# Allegro board TUBiiPrelim.brd
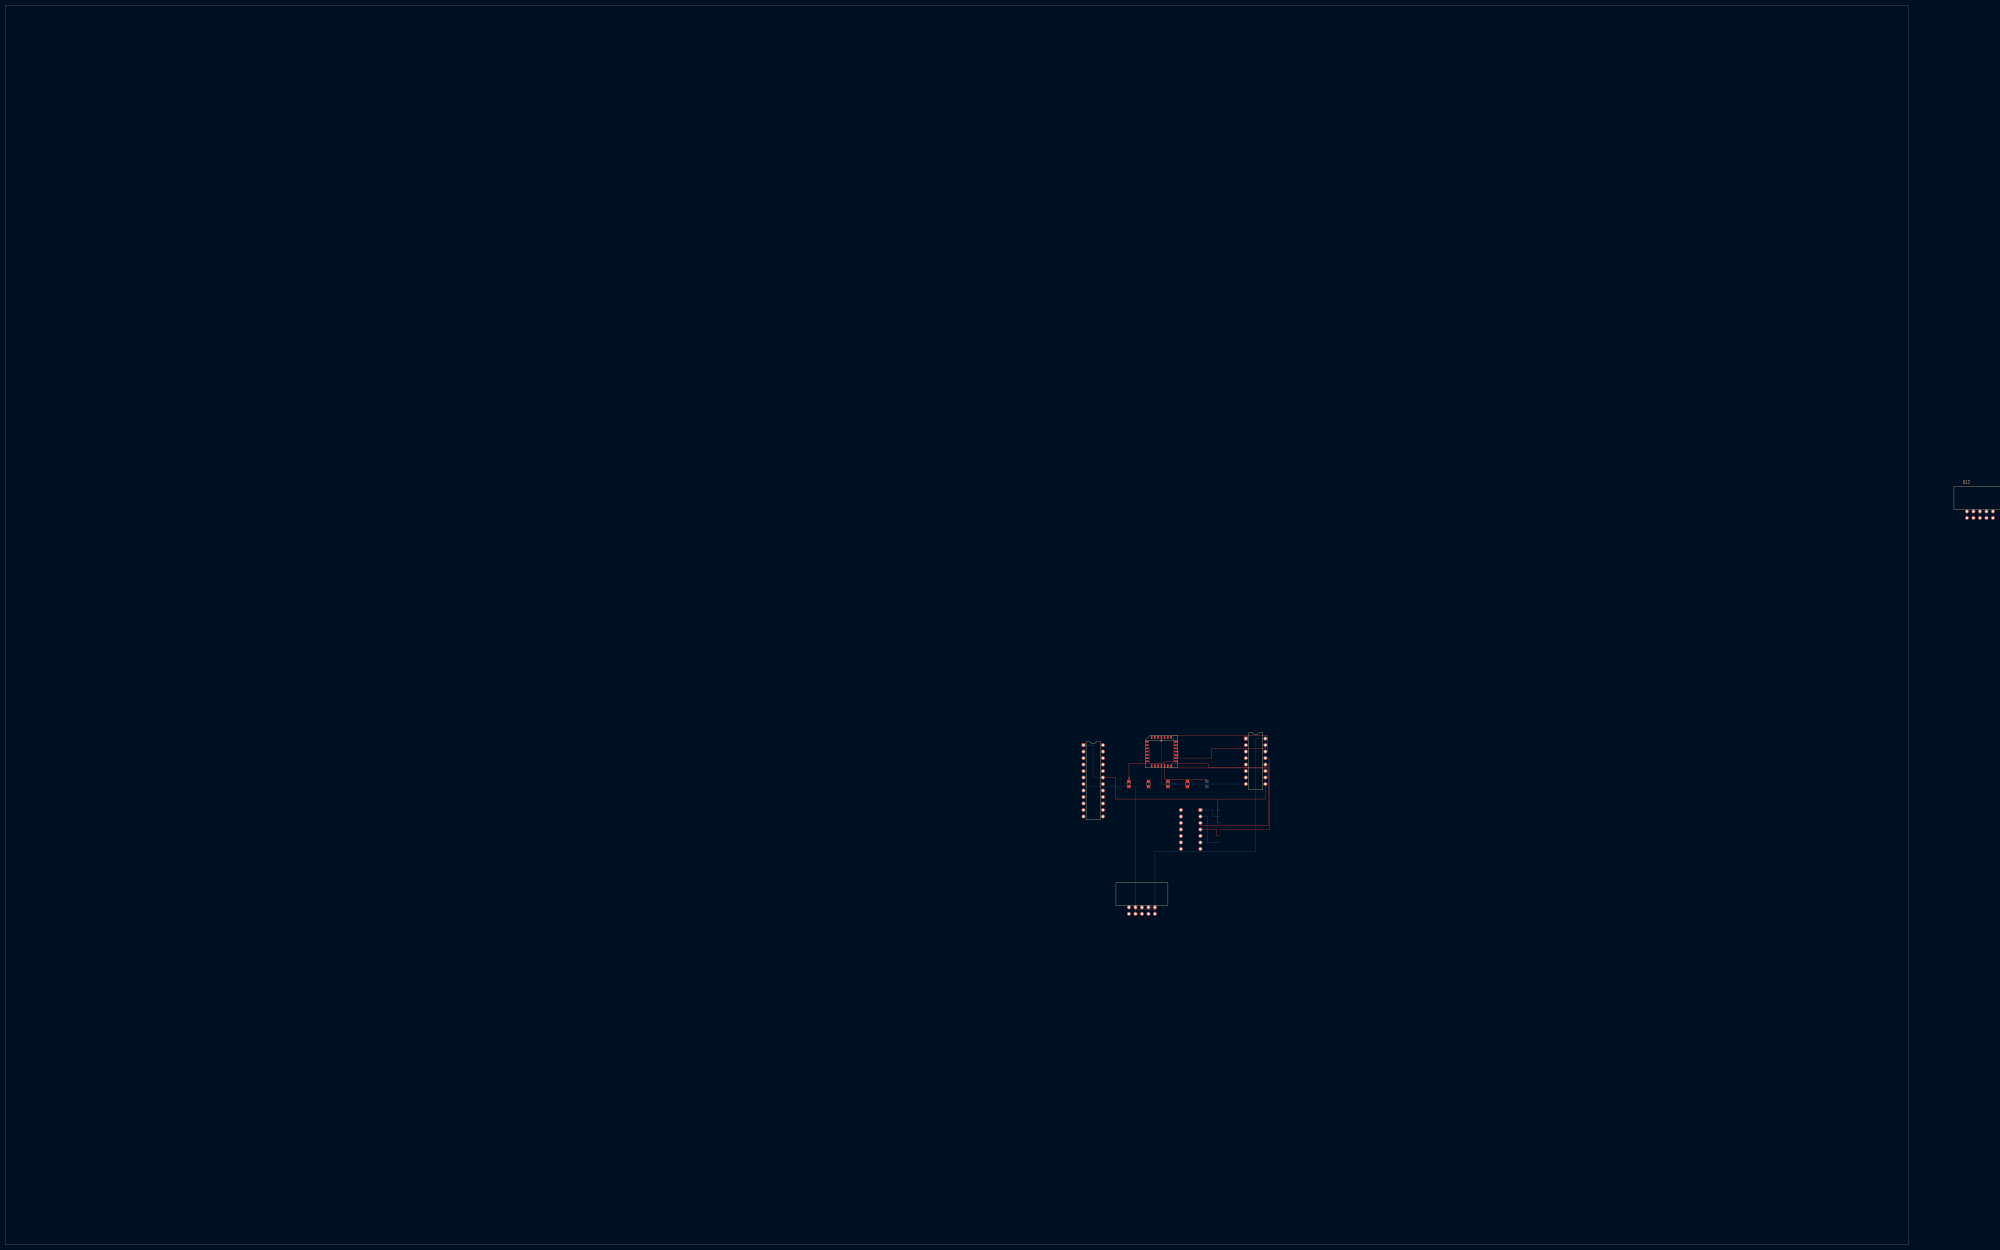
[diagram p0: board, top side]
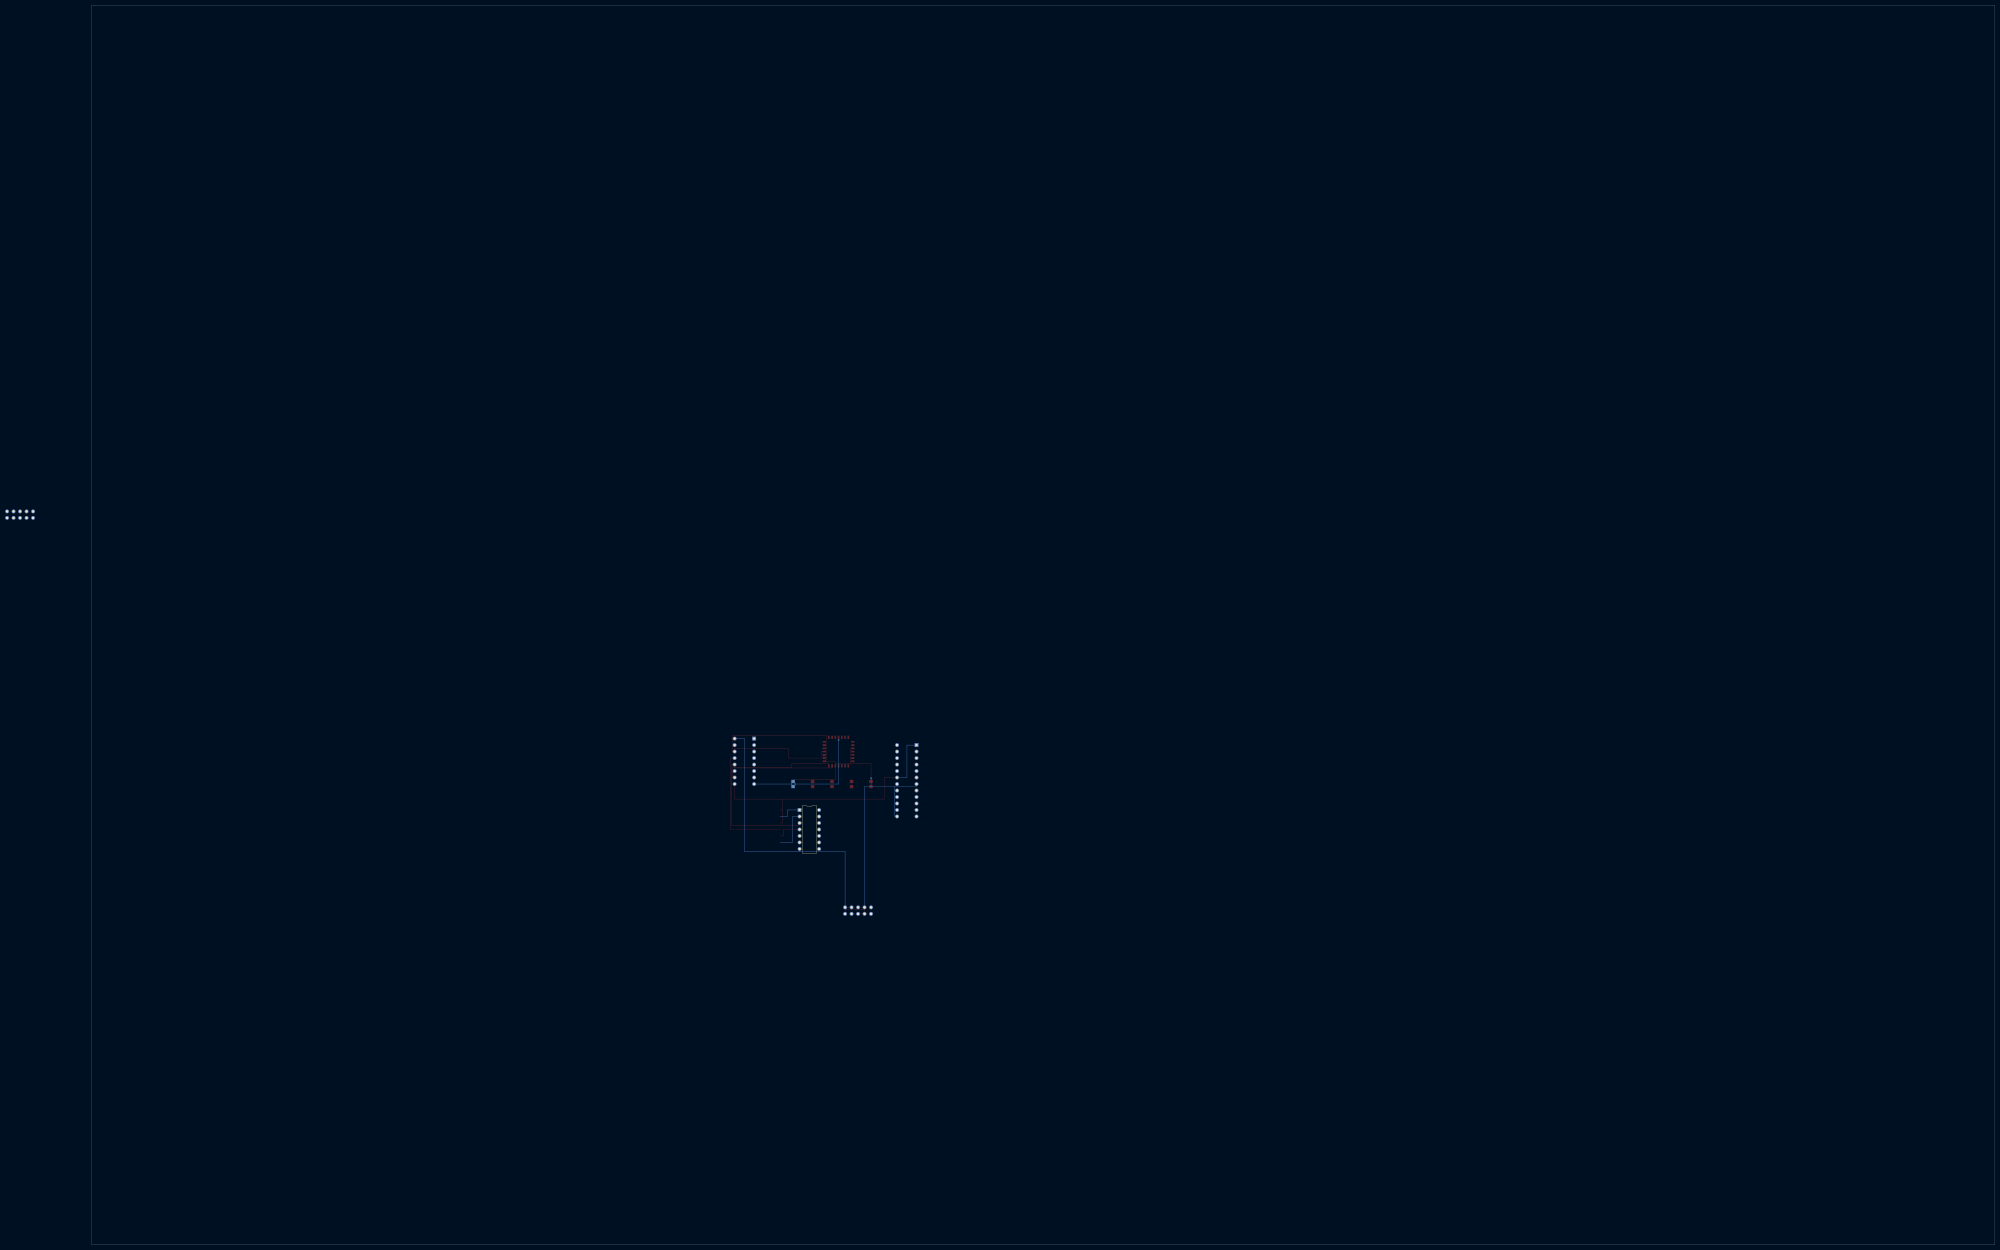
[diagram p1: board, bottom side, seen from below]

Outline 744.22 x 485.14 mm; copper layers: TOP, MYPLANE, VCC, BOTTOM. Coordinates in mm from the lower left corner of the outline.
Outline path: 0,485.14 0,0 744.22,0 744.22,485.14 0,485.14

## Design rules (mm)
net group POWER: nets POWER<2> POWER<3>
net group BD: nets BD<0> BD<1> BD<2> BD<3> BD<4> BD<5> BD<6> BD<7> BD<8>
net group BD_1: nets BD<0>_1 BD<1>_1 BD<2>_1 BD<3>_1 BD<4>_1 BD<5>_1 BD<6>_1 BD<7>_1 BD<8>_1
net group BD_2: nets BD<0>_2 BD<1>_2 BD<2>_2 BD<3>_2 BD<4>_2 BD<5>_2 BD<6>_2 BD<7>_2
net group BD_3: nets BD<0>_3 BD<1>_3 BD<2>_3 BD<3>_3 BD<4>_3 BD<5>_3 BD<6>_3 BD<7>_3
net group BD_4: nets BD<0>_4 BD<1>_4 BD<2>_4 BD<3>_4 BD<4>_4 BD<5>_4 BD<6>_4 BD<7>_4 BD<8>_2 BD<9> BD<10> BD<11> BD<12> BD<13> BD<14> BD<15>
net group BD_5: nets BD<0>_5 BD<1>_5 BD<2>_5 BD<3>_5 BD<4>_5 BD<5>_5 BD<6>_5 BD<7>_5 BD<8>_3 BD<9>_1 BD<10>_1 BD<11>_1 BD<12>_1 BD<13>_1 BD<14>_1 BD<15>_1
net group BD_ECL: nets BD_ECL<0> BD_ECL<1> BD_ECL<2> BD_ECL<3> BD_ECL<4> BD_ECL<5> BD_ECL<6> BD_ECL<7>
net group BURSTTRIGS: nets BURSTTRIGS<0> BURSTTRIGS<1> BURSTTRIGS<2> BURSTTRIGS<3>
net group BUS: nets BUS<0> BUS<1> BUS<2> BUS<3> BUS<4> BUS<5> BUS<6> BUS<7> BUS<8> BUS<9> BUS<10> BUS<11> BUS<12> BUS<13> BUS<14> BUS<15> BUS<16> BUS<17> BUS<18> BUS<19> BUS<20> BUS<21> BUS<22> BUS<23>
net group BUS_1: nets BUS<0>_1 BUS<1>_1 BUS<2>_1 BUS<3>_1 BUS<4>_1 BUS<5>_1 BUS<6>_1 BUS<7>_1 BUS<8>_1 BUS<9>_1 BUS<10>_1 BUS<11>_1 BUS<12>_1 BUS<13>_1 BUS<14>_1 BUS<15>_1 BUS<16>_1 BUS<17>_1 BUS<18>_1 BUS<19>_1 BUS<20>_1 BUS<21>_1 BUS<22>_1 BUS<23>_1 BUS<24> BUS<25> BUS<26> BUS<27> BUS<28> BUS<29> BUS<30> BUS<31>
net group BUS_2: nets BUS<0>_2 BUS<1>_2 BUS<2>_2 BUS<3>_2 BUS<4>_2 BUS<5>_2 BUS<6>_2 BUS<7>_2
net group BUS_3: nets BUS<0>_3 BUS<1>_3 BUS<2>_3 BUS<3>_3 BUS<4>_3 BUS<5>_3 BUS<6>_3 BUS<7>_3
net group D: nets D<0>
net group D_1: nets D<0>_1
net group EXTTRIG: nets EXTTRIG<0> EXTTRIG<1> EXTTRIG<2> EXTTRIG<3> EXTTRIG<4> EXTTRIG<5> EXTTRIG<6> EXTTRIG<7> EXTTRIG<8> EXTTRIG<9> EXTTRIG<10> EXTTRIG<11> EXTTRIG<12> EXTTRIG<13> EXTTRIG<14> EXTTRIG<15>
net group LOAD: nets LOAD<0> LOAD<1> LOAD<2> LOAD<3> LOAD<4> LOAD<5> LOAD<6> LOAD<7>
net group LOAD_1: nets LOAD<0>_1 LOAD<1>_1 LOAD<2>_1 LOAD<3>_1 LOAD<4>_1 LOAD<5>_1 LOAD<6>_1 LOAD<7>_1
net group PRESCALETRIGS: nets PRESCALETRIGS<0> PRESCALETRIGS<1> PRESCALETRIGS<2> PRESCALETRIGS<3>
net group RAWTRIGS: nets RAWTRIGS<0> RAWTRIGS<1> RAWTRIGS<2> RAWTRIGS<3>
net group RAWTRIGS_1: nets RAWTRIGS<0>_1 RAWTRIGS<1>_1 RAWTRIGS<2>_1 RAWTRIGS<3>_1
net group REG_IN: nets REG_IN<1> REG_IN<2> REG_IN<3> REG_IN<4> REG_IN<5> REG_IN<6> REG_IN<7> REG_IN<8>
net group UNNAMED_1_10E016_I14_P: nets UNNAMED_1_10E016_I14_P<0> UNNAMED_1_10E016_I14_P<1> UNNAMED_1_10E016_I14_P<2> UNNAMED_1_10E016_I14_P<3> UNNAMED_1_10E016_I14_P<4> UNNAMED_1_10E016_I14_P<5> UNNAMED_1_10E016_I14_P<6> UNNAMED_1_10E016_I14_P<7>
net group UNNAMED_1_10E016_I58_P: nets UNNAMED_1_10E016_I58_P<0> UNNAMED_1_10E016_I58_P<1> UNNAMED_1_10E016_I58_P<2> UNNAMED_1_10E016_I58_P<3> UNNAMED_1_10E016_I58_P<4> UNNAMED_1_10E016_I58_P<5> UNNAMED_1_10E016_I58_P<6> UNNAMED_1_10E016_I58_P<7>
net group UNNAMED_1_DS102350_I5_P: nets UNNAMED_1_DS102350_I5_P<0> UNNAMED_1_DS102350_I5_P<1> UNNAMED_1_DS102350_I5_P<2> UNNAMED_1_DS102350_I5_P<3> UNNAMED_1_DS102350_I5_P<4> UNNAMED_1_DS102350_I5_P<5> UNNAMED_1_DS102350_I5_P<6> UNNAMED_1_DS102350_I5_P<7>
net group UNNAMED_1_DS1023500_I1_P: nets UNNAMED_1_DS1023500_I1_P<0> UNNAMED_1_DS1023500_I1_P<1> UNNAMED_1_DS1023500_I1_P<2> UNNAMED_1_DS1023500_I1_P<3> UNNAMED_1_DS1023500_I1_P<4> UNNAMED_1_DS1023500_I1_P<5> UNNAMED_1_DS1023500_I1_P<6> UNNAMED_1_DS1023500_I1_P<7>
net group UNNAMED_1_F269_I2_P: nets UNNAMED_1_F269_I2_P<0> UNNAMED_1_F269_I2_P<1> UNNAMED_1_F269_I2_P<2> UNNAMED_1_F269_I2_P<3> UNNAMED_1_F269_I2_P<4> UNNAMED_1_F269_I2_P<5> UNNAMED_1_F269_I2_P<6> UNNAMED_1_F269_I2_P<7>
net group UNNAMED_1_F269_I4_P: nets UNNAMED_1_F269_I4_P<0> UNNAMED_1_F269_I4_P<1> UNNAMED_1_F269_I4_P<2> UNNAMED_1_F269_I4_P<3> UNNAMED_1_F269_I4_P<4> UNNAMED_1_F269_I4_P<5> UNNAMED_1_F269_I4_P<6> UNNAMED_1_F269_I4_P<7>
net group UNNAMED_1_F269_I8_P: nets UNNAMED_1_F269_I8_P<0> UNNAMED_1_F269_I8_P<1> UNNAMED_1_F269_I8_P<2> UNNAMED_1_F269_I8_P<3> UNNAMED_1_F269_I8_P<4> UNNAMED_1_F269_I8_P<5> UNNAMED_1_F269_I8_P<6> UNNAMED_1_F269_I8_P<7>
net group UNNAMED_1_F269_I14_P: nets UNNAMED_1_F269_I14_P<0> UNNAMED_1_F269_I14_P<1> UNNAMED_1_F269_I14_P<2> UNNAMED_1_F269_I14_P<3> UNNAMED_1_F269_I14_P<4> UNNAMED_1_F269_I14_P<5> UNNAMED_1_F269_I14_P<6> UNNAMED_1_F269_I14_P<7>
net group UNNAMED_1_F269_I20_P: nets UNNAMED_1_F269_I20_P<0> UNNAMED_1_F269_I20_P<1> UNNAMED_1_F269_I20_P<2> UNNAMED_1_F269_I20_P<3> UNNAMED_1_F269_I20_P<4> UNNAMED_1_F269_I20_P<5> UNNAMED_1_F269_I20_P<6> UNNAMED_1_F269_I20_P<7>
net group UNNAMED_1_F269_I20_P_1: nets UNNAMED_1_F269_I20_P<0>_1 UNNAMED_1_F269_I20_P<1>_1 UNNAMED_1_F269_I20_P<2>_1 UNNAMED_1_F269_I20_P<3>_1 UNNAMED_1_F269_I20_P<4>_1 UNNAMED_1_F269_I20_P<5>_1 UNNAMED_1_F269_I20_P<6>_1 UNNAMED_1_F269_I20_P<7>_1
net group UNNAMED_1_F269_I21_P: nets UNNAMED_1_F269_I21_P<0> UNNAMED_1_F269_I21_P<1> UNNAMED_1_F269_I21_P<2> UNNAMED_1_F269_I21_P<3> UNNAMED_1_F269_I21_P<4> UNNAMED_1_F269_I21_P<5> UNNAMED_1_F269_I21_P<6> UNNAMED_1_F269_I21_P<7>
net group UNNAMED_1_F269_I26_P: nets UNNAMED_1_F269_I26_P<0> UNNAMED_1_F269_I26_P<1> UNNAMED_1_F269_I26_P<2> UNNAMED_1_F269_I26_P<3> UNNAMED_1_F269_I26_P<4> UNNAMED_1_F269_I26_P<5> UNNAMED_1_F269_I26_P<6> UNNAMED_1_F269_I26_P<7>
net group UNNAMED_1_F269_I37_P: nets UNNAMED_1_F269_I37_P<0> UNNAMED_1_F269_I37_P<1> UNNAMED_1_F269_I37_P<2> UNNAMED_1_F269_I37_P<3> UNNAMED_1_F269_I37_P<4> UNNAMED_1_F269_I37_P<5> UNNAMED_1_F269_I37_P<6> UNNAMED_1_F269_I37_P<7>

## Placement (name value [footprint] x y rotation side)
C3  0.1UF  [CAP805]  439.42 180.34 0 top
C4  0.01UF  [CAP805]  447.04 180.34 0 top
C5  0.01UF  [CAP805]  454.66 180.34 0 top
C6  0.1UF  [CAP805]  462.28 180.34 0 top
C7  0.1UF  [CAP805]  469.9 180.34 180 bottom
U12  -  [CONN10]  767.08 284.48 0 top
U13  -  [CONN10]  439.42 129.54 0 top
U77  ***  [DIP24_3]  421.64 195.58 0 top
U78  ***  [PLCC28]  452.12 193.04 0 top
U79  ***  [DIP16_3]  485.14 198.12 0 top
U80  ***  [DIP14_3]  467.36 170.18 180 bottom

## Library data of the parts
C3 C6 C7 = CSMD0805: part number: CSMD0805-0.1UF,5%,0805,50V
C4 C5 = CSMD0805: part number: CSMD0805-0.01UF,10%,0805,25V
U12 U13 = IDS_C10: User Part Number: ***
U77 = 74F269
U78 = 10E116
U79 = 10H125
U80 = 74F74

## Footprints (pads in the part's own frame, mm; a bottom-side part is the same pattern mirrored in y, then rotated)
CAP805
  rect 1.372x1.27 smd: 1(0,1) 2(0,-1)
CONN10
  round 1.524 hole 0.914: 1(0,0) 2(0,2.54) 3(2.54,0) 4(2.54,2.54) 5(5.08,0) 6(5.08,2.54) 7(7.62,0) 8(7.62,2.54) 9(10.16,0) 10(10.16,2.54)
DIP14_3
  rect 1.524x1.524 hole 0.914: 1(0,0)
  round 1.524 hole 0.914: 2(0,-2.54) 3(0,-5.08) 4(0,-7.62) 5(0,-10.16) 6(0,-12.7) 7(0,-15.24) 8(7.62,-15.24) 9(7.62,-12.7) 10(7.62,-10.16) 11(7.62,-7.62) 12(7.62,-5.08) 13(7.62,-2.54) 14(7.62,0)
DIP16_3
  rect 1.524x1.524 hole 0.914: 1(0,0)
  round 1.524 hole 0.914: 2(0,-2.54) 3(0,-5.08) 4(0,-7.62) 5(0,-10.16) 6(0,-12.7) 7(0,-15.24) 8(0,-17.78) 9(7.62,-17.78) 10(7.62,-15.24) 11(7.62,-12.7) 12(7.62,-10.16) 13(7.62,-7.62) 14(7.62,-5.08) 15(7.62,-2.54) 16(7.62,0)
DIP24_3
  rect 1.524x1.524 hole 0.914: 1(0,0)
  round 1.524 hole 0.914: 2(0,-2.54) 3(0,-5.08) 4(0,-7.62) 5(0,-10.16) 6(0,-12.7) 7(0,-15.24) 8(0,-17.78) 9(0,-20.32) 10(0,-22.86) 11(0,-25.4) 12(0,-27.94) 13(7.62,-27.94) 14(7.62,-25.4) 15(7.62,-22.86) 16(7.62,-20.32) 17(7.62,-17.78) 18(7.62,-15.24) 19(7.62,-12.7) 20(7.62,-10.16) 21(7.62,-7.62) 22(7.62,-5.08) 23(7.62,-2.54) 24(7.62,0)
PLCC28
  rect 0.635x1.27 smd: 1(0,5.588) 2(-1.27,5.588) 3(-2.54,5.588) 4(-3.81,5.588) 12(-3.81,-5.588) 13(-2.54,-5.588) 14(-1.27,-5.588) 15(0,-5.588) 16(1.27,-5.588) 17(2.54,-5.588) 18(3.81,-5.588) 26(3.81,5.588) 27(2.54,5.588) 28(1.27,5.588)
  rect 1.27x0.635 smd: 5(-5.588,3.81) 6(-5.588,2.54) 7(-5.588,1.27) 8(-5.588,0) 9(-5.588,-1.27) 10(-5.588,-2.54) 11(-5.588,-3.81) 19(5.588,-3.81) 20(5.588,-2.54) 21(5.588,-1.27) 22(5.588,0) 23(5.588,1.27) 24(5.588,2.54) 25(5.588,3.81)

## Nets
GND: C3.1(A<0>) C6.1(A<0>) C7.1(A<0>) U12.2(PIN2) U12.3(PIN3) U12.7(PIN7) U12.8(PIN8) U13.3(PIN3) U13.4(PIN4) U13.5(PIN5) U13.8(PIN8) U13.9(PIN9) U13.10(PIN10) U77.7 U77.13(CET*) U78.7 U78.10 U78.13 U78.16 U78.19 U78.22 U79.16 U80.7
VCC: U77.1(UP/DN) U77.19 U79.9 U80.4(PR*) U80.10(PR*) U80.12(D<0>) U80.14
VEE: U78.1 U79.8
ECL_CLOCKINH: U78.25(A<0>)
ECL_CLOCKINL: U78.26(B*<0>)
ECL_PULSEINH: U78.23(A<0>)
ECL_PULSEINL: U78.24(B*<0>)
GTRIGH_ECL: U12.1(PIN1)
GTRIGL_ECL: U12.6(PIN6)
PLOADENABLE_TTL*: U77.24(PE*)
SYNC24H_ECL: U12.5(PIN5)
SYNC24H_LVDS: U13.6(PIN6)
SYNC24L_ECL: U12.10(PIN10)
SYNC24L_LVDS: U13.7(PIN7)
SYNCH_ECL: U12.4(PIN4)
SYNCH_LVDS: U13.1(PIN1)
SYNCL_ECL: U12.9(PIN9)
SYNCL_LVDS: U13.2(PIN2)
TTL_RESET: U79.5(Y<0>)
UNNAMED_1_10E101_I123_Y: U79.6(B*<0>)
UNNAMED_1_10E101_I123_Y_1: U79.7(A<0>)
UNNAMED_1_10E116_I3_Y: U78.18(Y*<0>) U79.10(B*<0>)
UNNAMED_1_10E116_I3_Y_1: U78.17(Y<0>) U79.11(A<0>)
UNNAMED_1_10E116_I9_A: U78.3(A<0>)
UNNAMED_1_10E116_I9_B: U78.4(B*<0>)
UNNAMED_1_10E116_I9_Y: U78.9(Y*<0>)
UNNAMED_1_10E116_I9_Y_1: U78.8(Y<0>)
UNNAMED_1_10E116_I10_A: U78.27(A<0>)
UNNAMED_1_10E116_I10_B: U78.28(B*<0>)
UNNAMED_1_10E116_I10_Y: U78.14(Y<0>)
UNNAMED_1_10E116_I10_Y_1: U78.15(Y*<0>)
UNNAMED_1_10E116_I15_Y: U78.21(Y*<0>) U79.14(B*<0>)
UNNAMED_1_10E116_I15_Y_1: U78.20(Y<0>) U79.15(A<0>)
UNNAMED_1_10E116_I16_A: U78.5(A<0>)
UNNAMED_1_10E116_I16_B: U78.6(B*<0>)
UNNAMED_1_10E116_I16_Y: U78.12(Y*<0>)
UNNAMED_1_10E116_I16_Y_1: U78.11(Y<0>)
UNNAMED_1_10E116_I182_B: C6.2(B<0>)
UNNAMED_1_10H116_I20_B: C7.2(B<0>)
UNNAMED_1_10H116_I59_B: C3.2(B<0>)
UNNAMED_1_10H125_I8_Y: U79.12(Y<0>) U80.3(CLOCK)
UNNAMED_1_10H125_I16_Y: U79.13(Y<0>) U80.11(CLOCK)
UNNAMED_1_10H125_I28_Y: U77.11(CP)
UNNAMED_1_10H125_I38_Y: U79.4(Y<0>)
UNNAMED_1_100EL34/_I30_OUT2: U79.2(B*<0>)
UNNAMED_1_100EL34/_I30_OUT2_1: U79.3(A<0>)
UNNAMED_1_CSMD0805_I20_A: C4.1(A<0>)
UNNAMED_1_CSMD0805_I20_B: C4.2(B<0>)
UNNAMED_1_CSMD0805_I25_A: C5.1(A<0>)
UNNAMED_1_CSMD0805_I25_B: C5.2(B<0>)
UNNAMED_1_F06_I38_A: U77.14(TC*)
UNNAMED_1_F08_I12_Y: U80.1(CL*) U80.13(CL*)
UNNAMED_1_F08_I19_B: U80.6(Q*<0>)
UNNAMED_1_F08_I39_Y: U77.12(CEP*)
UNNAMED_1_F74_I17_Q: U80.2(D<0>) U80.9(Q<0>)
UNNAMED_1_F269_I37_P<0>: U77.23(P<0>)
UNNAMED_1_F269_I37_P<1>: U77.22(P<1>)
UNNAMED_1_F269_I37_P<2>: U77.21(P<2>)
UNNAMED_1_F269_I37_P<3>: U77.20(P<3>)
UNNAMED_1_F269_I37_P<4>: U77.18(P<4>)
UNNAMED_1_F269_I37_P<5>: U77.17(P<5>)
UNNAMED_1_F269_I37_P<6>: U77.16(P<6>)
UNNAMED_1_F269_I37_P<7>: U77.15(P<7>)

Pads without a net: U77 2 3 4 5 6 8 9 10; U78 2; U79 1; U80 5 8

## Via types
v1: diameter 0.61, hole 0.33, TOP to BOTTOM, 2 vias

## Routing (per net, layer and track width the routed paths; a pad name or vN(x,y) marks a point on that pad's centre or on a via; arc(x,y) is an arc through that point)
GND: length 278.3
  TOP w0.127: 449.58,188.28 447.36,188.28 ; 449.58,188.28 U78.13 ; 449.58,188.28 453.39,188.28 ; 447.36,188.28 447.36,190.5 ; 447.36,188.28 439.42,188.28 v1(439.42,182.66) C3.1 ; U78.10 447.36,190.5 ; 447.36,190.5 447.36,194.31 U78.7 ; 449.58,131.13 U13.10 U13.8 ; 449.58,131.13 441.96,131.13 ; 449.58,131.13 U13.9 ; 453.39,188.28 U78.16 453.39,182.17 462.28,182.17 ; 453.39,188.28 453.39,189.23 456.88,189.23 ; U78.19 456.88,189.23 ; 456.88,189.23 456.88,191.26 458.79,191.26 458.79,193.04 U78.22 ; 462.28,182.17 C6.1 ; 462.28,182.17 469.9,182.17 C7.1 ; 441.96,131.13 U13.4 ; 441.96,131.13 U13.3 U13.5
  BOTTOM w0.127: U77.7 421.64,179.39 430.21,179.39 ; U79.16 488.89,198.12 488.89,153.99 467.36,153.99 ; 430.21,179.39 430.21,167.64 U77.13 ; 430.21,179.39 439.42,179.39 ; 467.36,153.99 449.58,153.99 U13.10 ; 467.36,153.99 U80.7 ; v1(439.42,182.66) 439.42,179.39 ; 439.42,179.39 441.96,179.39 U13.4
VCC: length 119.6
  TOP w0.127: 474.98,165.1 474.03,165.1 474.03,170.18 ; 474.03,174.43 434.28,174.43 434.28,182.88 U77.19 ; 474.03,174.43 474.03,170.18 ; 474.03,174.43 492.76,174.43 U79.9 ; 474.98,170.18 474.03,170.18 ; U80.4 473.77,162.56 473.77,160.02 474.98,160.02
  BOTTOM w0.127: U77.19 425.39,182.88 425.39,195.58 U77.1
VEE: length 51.3
  TOP w0.127: U78.1 v1(452.12,197.56)
  BOTTOM w0.127: v1(452.12,197.56) 452.12,180.34 U79.8
UNNAMED_1_10E116_I3_Y: length 45
  TOP w0.127: U78.18 455.93,188.28 470.41,188.28 470.41,186.88 493.71,186.88 493.71,182.88 U79.10
UNNAMED_1_10E116_I3_Y_1: length 40.1
  TOP w0.127: U78.17 454.66,186.63 492.76,186.63 U79.11
UNNAMED_1_10E116_I15_Y: length 52.5
  TOP w0.127: U79.14 493.71,193.04 493.71,199.33 456.88,199.33 456.88,191.77 U78.21
UNNAMED_1_10E116_I15_Y_1: length 40.1
  TOP w0.127: U78.20 471.74,190.5 471.74,194.25 492.76,194.25 U79.15
UNNAMED_1_10H125_I8_Y: length 52.6
  TOP w0.127: U80.3 467.36,164.15 493.97,164.15 493.97,187.96 U79.12
UNNAMED_1_10H125_I16_Y: length 49.1
  TOP w0.127: U79.13 494.47,190.5 494.47,162.56 474.98,162.56
UNNAMED_1_F08_I12_Y: length 10.2
  BOTTOM w0.127: U80.1 472.12,170.18 472.12,167.64 474.98,167.64
UNNAMED_1_F74_I17_Q: length 17.8
  BOTTOM w0.127: U80.2 470.09,167.64 470.09,157.48 474.98,157.48
